# Altium PCB mini_backplane.PcbDoc (part 3 of 3)
Units mil, origin at the board's own origin, x right, y up, seen from the top; angles counter-clockwise.
Board outline 11387.22 x 6068.2 mil, 4 copper layers (Top Layer, POWER, GND, Bottom Layer); 147 components, 166 nets, 1018 pads, 501 vias.
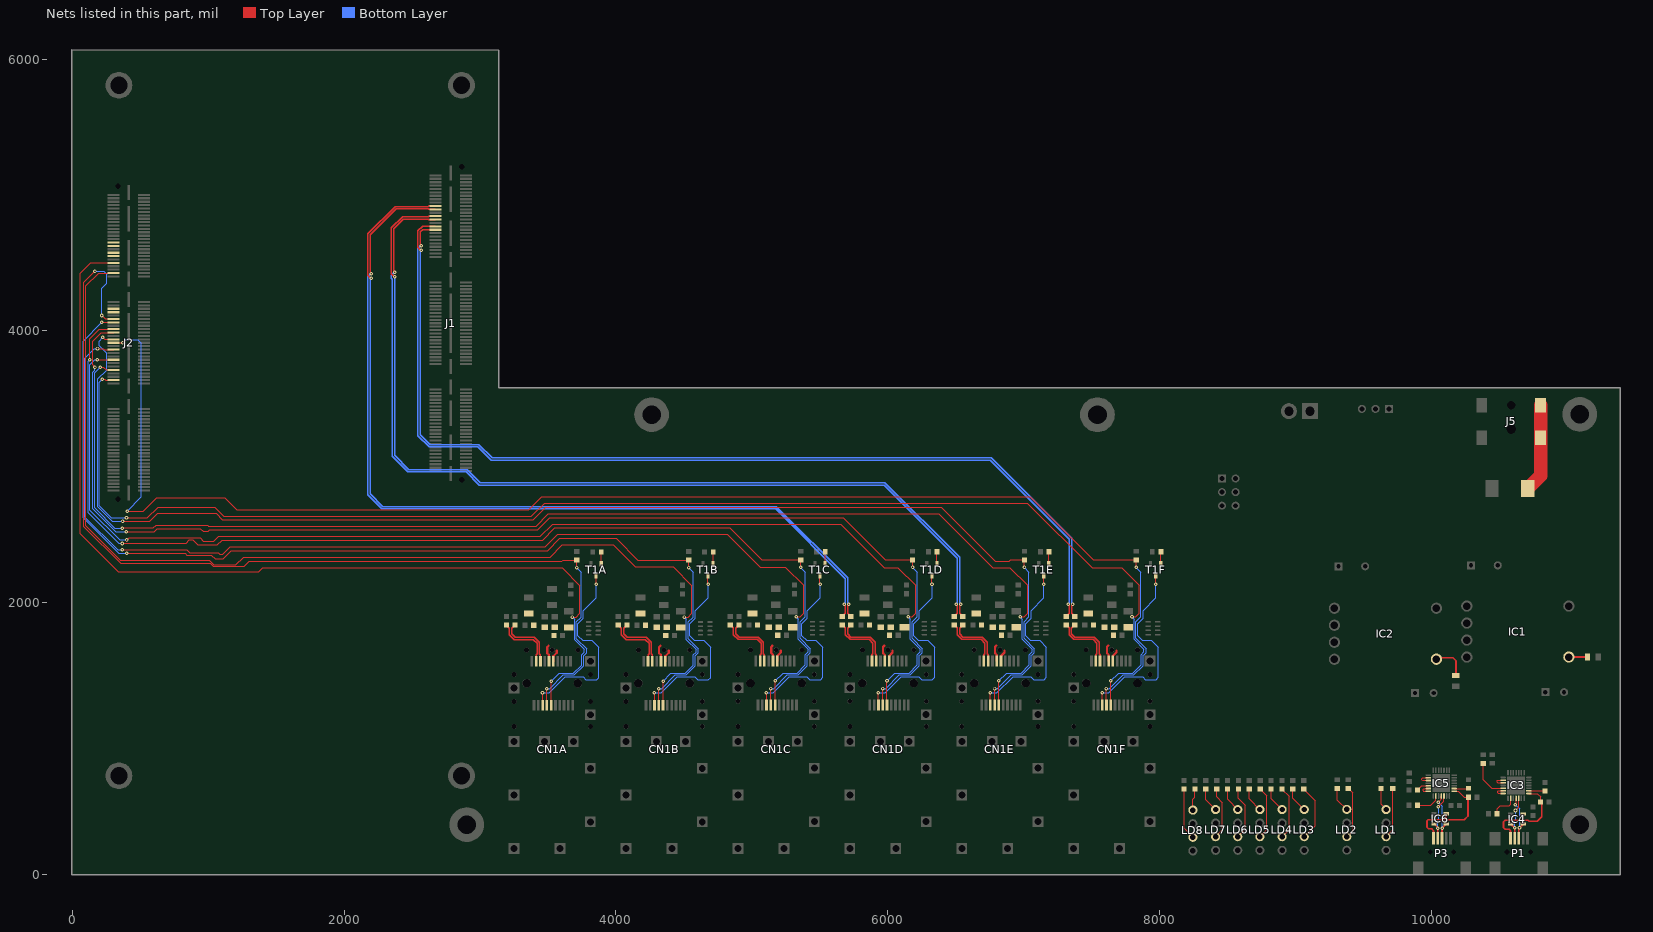
[diagram p5: the nets of this part, all layers, seen from the top]

## Via types
v1: diameter 26, hole 12, Top Layer to Bottom Layer, tented both sides, 501 vias

## Nets (pads, with @x,y where several pads share a name; then routed paths per layer and width w, separated by ;. In a path a pad name is that pad's centre, name@x,y a point inside that pad or via, vN(x,y) a via of type N, cw(c..) or ccw(c..) an arc to the next point about the centre after c; other vN are vias at no path point) (continued)
MGTTX112_3_N: C8D.1 J1.16 | length 6551.1
  Top Layer w11: v1(2201,4421) 2193,4429 2193,4707 2384.51,4898.51 2618.68,4898.51 2622.78,4894.41 J1.16@2672.64,4894.41 ; C8D.1@5665.18,1901.08 5688.18,1924.08 v1@5688.18,1983.5 ; v1(5680.68,1991) v1@5688.18,1983.5 ; v1@5688.18,1985 v1@5688.18,1983.5
  Bottom Layer w11: v1(2201,4421) 2197.35,4421 2175,4398.65 2175,2794.96 2278.96,2691 5174,2691 5688.18,2176.82 5688.18,1998.5 v1(5680.68,1991)
MGTTX112_3_P: C7D.1 J1.14 | length 6583.2
  Top Layer w11: v1(2200,4389) 2198.35,4389 2176,4411.35 2176,4714.04 2377.47,4915.51 2618.68,4915.51 2622.78,4919.61 J1.14@2672.64,4919.61 ; v1@5707.41,1996.27 v1(5712.68,1991) 5705.18,1983.5 5705.18,1924.08 C7D.1@5728.18,1901.08
  Bottom Layer w11: v1(2200,4389) 2192,4381 2192,2802 2286,2708 5181.04,2708 5705.18,2183.86 5705.18,1998.5 v1(5712.68,1991)
MGTTX113_0_N: C8E.1 J1.20 | length 6942.8
  Top Layer w11: v1(2373,4431) 2365,4439 2365,4439.5 2365,4751 2437.55,4823.55 2618.68,4823.55 2622.78,4819.45 J1.20@2672.64,4819.45 ; C8E.1@6488.18,1901.08 6511.18,1924.08 6511.18,1949.06 6511.18,1955 6511.18,1985 6511.18,1983.5 v1(6503.68,1991)
  Bottom Layer w11: v1(2373,4431) 2370.35,4431 2347.5,4408.15 2347.5,4387.85 2355,4380.35 2355,3078.96 2469.96,2964 2898.96,2964 2995.96,2867 5972,2867 6511.18,2327.82 6511.18,1998.5 v1(6503.68,1991)
MGTTX113_0_P: C7E.1 J1.18 | length 6967.2
  Top Layer w11: v1(2372,4398) 2371.35,4398 2348,4421.35 2348,4439.5 2348,4758.04 2430.51,4840.55 2618.68,4840.55 2622.78,4844.65 J1.18@2672.64,4844.65 ; v1@6530.41,1996.27 v1(6535.68,1991) 6528.18,1983.5 6528.18,1924.08 C7E.1@6551.18,1901.08
  Bottom Layer w11: v1(2372,4398) 2372,3086 2477,2981 2906,2981 3003,2884 5979.04,2884 6528.18,2334.86 6528.18,1998.5 v1(6535.68,1991)
MGTTX113_1_N: C8F.1 J1.24 | length 7322
  Top Layer w11: v1(2568,4626) 2562,4632 2562,4729 2579,4746 2671.13,4746 J1.24@2672.64,4744.49 ; C8F.1@7311.18,1901.08 7334.18,1924.08 v1@7334.18,1983.5 ; v1(7326.68,1991) v1@7334.18,1983.5 ; v1@7334.18,1985 v1@7334.18,1983.5
  Bottom Layer w11: v1(2568,4626) 2565.35,4626 2543,4603.65 2543,3230.96 2625.96,3148 2984.96,3148 3082.96,3050 6752,3050 7334.18,2467.82 7334.18,1998.5 v1(7326.68,1991)
MGTTX113_1_P: C7F.1 J1.22 | length 7351.9
  Top Layer w11: v1(2568,4594) 2565.35,4594 2543.5,4615.85 2543.5,4735.5 2577.68,4769.68 J1.22@2672.64,4769.68 ; v1(7358.68,1991) 7351.18,1983.5 7351.18,1924.08 C7F.1@7374.18,1901.08
  Bottom Layer w11: v1@2560,4586 2560,3238 2633,3165 2992,3165 3090,3067 6759.04,3067 7351.18,2474.86 7351.18,1998.5 v1(7358.68,1991) ; v1@2560,4587 v1@2567.5,4594.5
NetC1A_1: C1A.1 C2A.1 CN1A.15 L2A.1 | length 89.7
  Top Layer w16: CN1A.15@3539.58,1570.85 3539.58,1608.37 3565,1633.78 3565,1650
NetC1B_1: C1B.1 C2B.1 CN1B.15 L2B.1 | length 89.7
  Top Layer w16: CN1B.15@4362.58,1570.85 4362.58,1608.37 4388,1633.78 4388,1650
NetC1C_1: C1C.1 C2C.1 CN1C.15 L2C.1 | length 89.7
  Top Layer w16: CN1C.15@5186.58,1571.85 5186.58,1609.37 5212,1634.78 5212,1651
NetC1D_1: C1D.1 C2D.1 CN1D.15 L2D.1 | length 89.7
  Top Layer w16: CN1D.15@6009.58,1571.85 6009.58,1609.37 6035,1634.78 6035,1651
NetC1E_1: C1E.1 C2E.1 CN1E.15 L2E.1 | length 89.7
  Top Layer w16: CN1E.15@6832.58,1571.85 6832.58,1609.37 6858,1634.78 6858,1651
NetC1F_1: C1F.1 C2F.1 CN1F.15 L2F.1 | length 89.7
  Top Layer w16: CN1F.15@7655.58,1571.85 7655.58,1609.37 7681,1634.78 7681,1651
NetC3A_2: C3A.2 C4A.2 CN1A.16 L1A.1 | length 123.7
  Top Layer w16: 3505,1685 3495,1675 3495,1630 3508.09,1616.91 CN1A.16@3508.09,1570.85
NetC3B_2: C3B.2 C4B.2 CN1B.16 L1B.1 | length 123.7
  Top Layer w16: 4328,1685 4318,1675 4318,1630 4331.09,1616.91 CN1B.16@4331.09,1570.85
NetC3C_2: C3C.2 C4C.2 CN1C.16 L1C.1 | length 123.7
  Top Layer w16: 5152,1686 5142,1676 5142,1631 5155.09,1617.91 CN1C.16@5155.09,1571.85
NetC3D_2: C3D.2 C4D.2 CN1D.16 L1D.1 | length 123.7
  Top Layer w16: 5975,1686 5965,1676 5965,1631 5978.09,1617.91 CN1D.16@5978.09,1571.85
NetC3E_2: C3E.2 C4E.2 CN1E.16 L1E.1 | length 123.7
  Top Layer w16: 6798,1686 6788,1676 6788,1631 6801.09,1617.91 CN1E.16@6801.09,1571.85
NetC3F_2: C3F.2 C4F.2 CN1F.16 L1F.1 | length 123.7
  Top Layer w16: 7621,1686 7611,1676 7611,1631 7624.09,1617.91 CN1F.16@7624.09,1571.85
NetC14_1: C14.1 IC3.8 IC4.4 P1.1 | length 756.2
  Top Layer w6: IC3.8@10715.49,597.94 10776.06,597.94 10801.5,572.5 C14.1@10801.5,536
  Top Layer w12: P1.1@10579.99,269 10579.99,325.01 10570,335 10541,335 10529,347 10529,390 10541,402 10675,402 ; IC4.4@10673.28,447.4 10675,445.68 10675,402 ; C14.1@10801.5,536 10811,526.5 10811,426.64 10777.36,393 10717,393 10708,402 10675,402
NetC16_1: C16.1 IC5.8 IC6.4 P3.1 | length 802.9
  Top Layer w6: IC5.8@10165.49,614.94 10195.06,614.94 10239,571 C16.1@10271.5,571
  Top Layer w12: P3.1@10013.99,269 10013.99,325.01 10000,339 9977,339 9966,350 9966,396 9974,404 10048,404 ; 10062.87,404 10048,404 ; IC6.4@10108.28,449.4 10108.28,405.72 10110,404 ; C16.1@10271.5,571 10268,567.5 10268,432 10240,404 10048,404
NetD1_2: D1.2 J5.3 | length 653.4
  Top Layer w100: D1.2@10706.89,2841 10801.54,2935.65 J5.3@10801.54,3215.01 J5.3@10801.54,3455.17
NetIC1_5: IC1.5 R18.2 | length 137.4
  Top Layer w12: IC1.5@11009.2,1601.99 R18.2@11146.62,1601.99
NetIC2_5: IC2.5 R19.2 | length 261.5
  Top Layer w12: IC2.5@10036.2,1596.99 10157.01,1596.99 10179,1575 R19.2@10179,1465.37
NetIC3_2: IC3.2 R21.2 | length 194.2
  Top Layer w6: R21.2@10481.5,449 10481.5,485.5 10503,507 10570,507 10581.63,518.63 IC3.2@10581.63,562.51
NetIC3_4: IC3.4 IC4.3 P1.3 | length 348
  Top Layer w6: v1(10616,515) 10621,520 IC3.4@10621,562.51
  Top Layer w12: P1.3@10642,269 10642,341.32 v1(10646.34,345.66) IC4.3@10673.28,372.6
  Bottom Layer w6: v1(10616,515) 10646.34,484.66 v1(10646.34,345.66)
NetIC3_5: IC3.5 IC4.2 P1.2 | length 345.3
  Top Layer w6: v1(10617,473) 10640.68,496.68 IC3.5@10640.68,562.51
  Top Layer w12: IC4.2@10582.72,372.6 v1(10610.5,344.82) P1.2@10610.5,269
  Bottom Layer w6: v1(10610.5,344.82) 10610.5,399.5 10617,406 v1(10617,473)
NetIC3_9: IC3.9 R20.1 | length 119
  Top Layer w6: IC3.9@10715.49,617.63 10832.87,617.63 R20.1@10834,616.5
NetIC3_23: IC3.23 IC3.24 | length 106.2
  Top Layer w6: IC3.24@10526.51,676.68 10485.32,676.68 10481,681 10481,693 10484.37,696.37 10489,696.37 10492,696.37 IC3.23@10526.51,696.37
NetIC3_26: IC3.26 R22.2 | length 293.2
  Top Layer w6: R22.2@10380,819.5 10380,698 10440.68,637.32 IC3.26@10526.51,637.32
NetIC3_27: IC3.27 IC3.28 | length 95.6
  Top Layer w6: IC3.28@10526.51,597.94 10525.46,599 10490,599 10486,603 10486,614 10489.63,617.63 IC3.27@10526.51,617.63
NetIC5_2: IC5.2 R25.2 | length 181.6
  Top Layer w6: R25.2@9896.5,511 9994,511 10031.63,548.63 IC5.2@10031.63,579.51
NetIC5_4: IC5.4 IC6.3 P3.3 | length 377.5
  Top Layer w6: v1(10050,533) 10050,535 10071,556 IC5.4@10071,579.51
  Top Layer w12: P3.3@10076,269 v1@10076,342.32 ; v1(10077,342) 10076.32,342 v1@10076,342.32 ; IC6.3@10108.28,374.6 v1@10076,342.32
  Bottom Layer w6: v1(10050,533) 10077,506 v1(10077,342)
NetIC5_5: IC5.5 IC6.2 P3.2 | length 373.3
  Top Layer w6: v1@10050,501.89 10090.68,542.57 IC5.5@10090.68,579.51
  Top Layer w12: IC6.2@10017.72,374.6 10044.5,347.82 v1(10044.5,342) P3.2@10044.5,269
  Bottom Layer w6: v1(10044.5,342) 10044.5,400.5 10051,407 10051,500 v1(10050,501)
NetIC5_9: IC5.9 R24.1 | length 106.3
  Top Layer w6: IC5.9@10165.49,634.63 10269.13,634.63 R24.1@10271,636.5
NetIC5_23: IC5.23 IC5.24 | length 107.9
  Top Layer w6: IC5.24@9976.51,693.68 9976.2,694 9935,694 9929,700 9929,708 9934.37,713.37 IC5.23@9976.51,713.37
NetIC5_26: IC5.26 R26.2 | length 92.6
  Top Layer w6: R26.2@9896.5,624 9926.81,654.32 IC5.26@9976.51,654.32
NetIC5_27: IC5.27 IC5.28 | length 95.4
  Top Layer w6: IC5.28@9976.51,614.94 9939.06,614.94 9937,617 9937,631 9940.63,634.63 IC5.27@9976.51,634.63
NetLD1_2: LD1.2 R1.2 | length 372.8
  Top Layer w6: LD1.2@9665,283 9714,332 R1.2@9714,635.5
NetLD1_4: LD1.4 R2.2 | length 167.8
  Top Layer w6: R2.2@9628,635.5 9628,520 LD1.4@9665,483
NetLD2_2: LD2.2 R3.2 | length 385.5
  Top Layer w6: LD2.2@9376,281 9418.46,323.46 9418.46,603.04 R3.2@9386,635.5
NetLD2_4: LD2.4 R4.2 | length 183.1
  Top Layer w6: R4.2@9307,635.5 9307,550 LD2.4@9376,481
NetLD3_2: LD3.2 R5.2 | length 419.3
  Top Layer w6: R5.2@9059,630.5 9144,545.5 9144,361 LD3.2@9063,280
NetLD3_4: LD3.4 R6.2 | length 185.3
  Top Layer w6: R6.2@8979,630.5 8979,564 LD3.4@9063,480
NetLD4_2: LD4.2 R7.2 | length 394
  Top Layer w6: R7.2@8899,630.5 8952,577.5 8952,332.01 LD4.2@8899.99,280
NetLD4_4: LD4.4 R8.2 | length 184
  Top Layer w6: R8.2@8819,630.5 8819,560.99 LD4.4@8899.99,480
NetLD5_2: LD5.2 R9.2 | length 391.9
  Top Layer w6: LD5.2@8736.97,280 8788,331.03 8788,581.5 R9.2@8739,630.5
NetLD5_4: LD5.4 R10.2 | length 182.8
  Top Layer w6: R10.2@8659,630.5 8659,557.97 LD5.4@8736.97,480
NetLD6_2: LD6.2 R11.2 | length 393.2
  Top Layer w6: LD6.2@8573.96,280 8628,334.04 8628,513 8579,562 R11.2@8579,630.5
NetLD6_4: LD6.4 R12.2 | length 181.6
  Top Layer w6: R12.2@8499,630.5 8499,554.96 LD6.4@8573.96,480
NetLD7_2: LD7.2 R13.2 | length 388.6
  Top Layer w6: LD7.2@8410.95,280 8461,330.05 8461,531 8419,573 R13.2@8419,630.5
NetLD7_4: LD7.4 R14.2 | length 180.3
  Top Layer w6: R14.2@8339,630.5 8339,551.95 LD7.4@8410.95,480
NetLD8_2: LD8.2 R15.2 | length 381.4
  Top Layer w6: R15.2@8179,630.5 8179,341.06 LD8.2@8244,276.06
NetLD8_4: LD8.4 R16.2 | length 160.7
  Top Layer w6: LD8.4@8244,476.06 8244,554 8259,569 R16.2@8259,630.5
NetR28A_2: R28A.2 T1A.1 | length 86.2
  Top Layer w6: T1A.1@3891.4,2288.28 3891.4,2372.91 R28A.2@3892.5,2374
NetR28B_2: R28B.2 T1B.1 | length 86.2
  Top Layer w6: T1B.1@4714.4,2288.28 4714.4,2372.91 R28B.2@4715.5,2374
NetR28C_2: R28C.2 T1C.1 | length 86.2
  Top Layer w6: T1C.1@5538.4,2289.28 5538.4,2373.91 R28C.2@5539.5,2375
NetR28D_2: R28D.2 T1D.1 | length 86.2
  Top Layer w6: T1D.1@6361.4,2289.28 6361.4,2373.91 R28D.2@6362.5,2375
NetR28E_2: R28E.2 T1E.1 | length 86.2
  Top Layer w6: T1E.1@7184.4,2289.28 7184.4,2373.91 R28E.2@7185.5,2375
NetR28F_2: R28F.2 T1F.1 | length 86.2
  Top Layer w6: T1F.1@8007.4,2289.28 8007.4,2373.91 R28F.2@8008.5,2375
PB0: CN1B.4 J2.57 R17B.1 | length 7645.9
  Top Layer w6: v1(219,4063) 219.15,4063.15 J2.57@304.53,4063.15 ; v1(401,2365) 832,2365 845,2352 1025,2352 1053,2324 1110,2324 1171,2385 1243,2385 ; 1213,2385 1243,2385 ; v1(4315,1369) 4315.34,1368.66 CN1B.4@4315.34,1248.02 ; 4434.5,2315.5 4453,2315.5 ; v1(4535,2260) R17B.1@4535,2315.5 4453,2315.5 ; 1243,2385 3496.97,2385 3585.97,2474 4001.88,2474 4160.38,2315.5 4453,2315.5
  Bottom Layer w6: v1(219,4063) 81,3925 81,2626.03 342.03,2365 v1(401,2365) ; v1(4315,1369) 4336,1369 4437,1470 4517,1470 4585,1538 4585,1612.29 4591.93,1619.22 4592.22,1619.22 4607,1634 4607,1663 4532,1738 4532,1860 4568,1896 4568,2226 v1@4532,2262
PB1: CN1D.4 J2.53 R17D.1 | length 9025.9
  Top Layer w6: v1(168,3734) 151,3751 151,3924 215.19,3988.19 J2.53@304.53,3988.19 ; v1(398,2524) 604,2524 626,2546 943,2546 963,2526 1003,2526 1014,2537 1229,2537 ; 1225,2537 1229,2537 ; v1(5962,1370) 5962.34,1369.66 CN1D.4@5962.34,1249.02 ; v1(6182,2261) R17D.1@6182,2316.5 5982.38,2316.5 5671.88,2627 3515.12,2627 3425.12,2537 1229,2537
  Bottom Layer w6: v1(168,3734) 168,3713 153,3698 153,2693.15 322.15,2524 v1(398,2524) ; v1(5962,1370) 5983,1370 6084,1471 6164,1471 6232,1539 6232,1613.29 6238.93,1620.22 6239.22,1620.22 6254,1635 6254,1664 6179,1739 6179,1861 6215,1897 6215,2227 v1@6179,2263
PB2: CN1C.4 J2.55 R17C.1 | length 8325.7
  Top Layer w6: v1(129,3789) 129,3942 200.39,4013.39 J2.55@304.53,4013.39 ; v1(369,2437) 370,2438 838,2438 863,2463 887,2463 924,2426 1068,2426 1103,2461 1232,2461 ; 1217,2461 1232,2461 ; v1(5139,1370) 5139.34,1369.66 CN1C.4@5139.34,1249.02 ; v1(5359,2261) R17C.1@5359,2316.5 5074.53,2316.5 4839.03,2552 3551.12,2552 3460.12,2461 1232,2461
  Bottom Layer w6: v1(129,3789) 117,3777 117,2664 344,2437 v1(369,2437) ; v1(5139,1370) 5160,1370 5261,1471 5341,1471 5409,1539 5409,1613.29 5415.93,1620.22 5416.22,1620.22 5431,1635 5431,1664 5356,1739 5356,1861 5392,1897 5392,2227 v1@5356,2263
PB3: CN1E.4 J2.51 R17E.1 | length 9825.1
  Top Layer w6: v1(226,3954) 241.58,3938.43 J2.51@304.53,3938.43 ; v1(371,2601) 571,2601 629.12,2659.12 1006,2659.12 ; 993.12,2659.12 1006,2659.12 ; v1(6785,1370) 6785.34,1369.66 CN1E.4@6785.34,1249.02 ; v1(7005,2261) R17E.1@7005,2316.5 6904.5,2316.5 6895,2307 6791.03,2307 6394.03,2704 3484.12,2704 3393.12,2613 1106.06,2613 1059.94,2659.12 1006,2659.12
  Bottom Layer w6: v1(226,3954) 198,3926 198,3891 253,3836 253,3713 189,3649 189,2708.06 296.06,2601 v1(371,2601) ; v1(6785,1370) 6806,1370 6907,1471 6987,1471 7055,1539 7055,1613.29 7061.93,1620.22 7062.22,1620.22 7077,1635 7077,1664 7002,1739 7002,1861 7038,1897 7038,2227 v1@7002,2263
PB4: CN1A.4 J2.59 R17A.1 | length 7539.6
  Top Layer w6: 85,2716 85,2694 ; v1(168,4440) 85,4357 85,2694 ; v1(219,4114) 244.65,4088.35 J2.59@304.53,4088.35 ; 366,2290 378,2290 ; 1405,2306 1408,2306 ; v1(3492,1369) 3492.34,1368.66 CN1A.4@3492.34,1248.02 ; v1(3712,2260) R17A.1@3712,2315.5 3611.5,2315.5 3602,2306 1408,2306 ; 85,2694 85,2561 356,2290 378,2290 ; 378,2290 1016,2290 1037,2269 1265.11,2269 1302.11,2306 1408,2306
  Bottom Layer w6: v1(168,4440) 233,4440 255,4418 255,4350 219,4314 v1(219,4114) ; v1(3492,1369) 3513,1369 3614,1470 3694,1470 3762,1538 3762,1612.29 3768.93,1619.22 3769.22,1619.22 3784,1634 3784,1663 3709,1738 3709,1860 3745,1896 3745,2226 v1@3709,2262
PB5: J2.61
PB6: CN1F.4 J2.49 R17F.1 | length 10549.7
  Top Layer w6: J2.49@303.76,3914 J2.49@304.53,3913.23 371.77,3913.23 v1(372,3913) ; v1(405,2674) 525,2674 623,2772 1123.89,2772 1210.89,2685 3358.12,2685 3455.12,2782 7046.88,2782 7512.38,2316.5 R17F.1@7828,2316.5 v1(7828,2261) ; v1(7608,1370) 7608.34,1369.66 CN1F.4@7608.34,1249.02
  Bottom Layer w6: v1@372,3914 395,3937 482,3937 510,3909 510,2779 v1(405,2674) ; v1(7608,1370) 7629,1370 7730,1471 7810,1471 7878,1539 7878,1613.29 7884.93,1620.22 7885.22,1620.22 7900,1635 7900,1664 7825,1739 7825,1861 7861,1897 7861,2227 v1@7825,2263
PB7: J2.63
PE1: J2.75
PE2: J2.73
PE4: CN1D.5 J2.43 | length 8828.9
  Top Layer w6: v1(186,3789) 186.5,3788.5 J2.43@304.53,3788.5 ; v1@402,2454 398,2458 419,2479 941.11,2479 966.11,2454 1042,2454 1061,2473 ; 1058,2470 1061,2473 ; 1225,2489 1229,2489 ; CN1D.5@5993.83,1249.02 5993.83,1425.83 v1(5994,1426) ; v1(6150,1897) 6179,1897 6205,1923 6205,2128 6074,2259 5972,2259 5652,2579 3535,2579 3445,2489 1229,2489 ; 1061,2473 1077,2489 1229,2489
  Bottom Layer w6: v1(186,3789) 166.03,3789 129,3751.97 129,2683.21 349.21,2463 v1(402,2463) ; v1(5994,1426) 6052,1484 6157,1484 6217,1544 6217,1618 6238,1639 6238,1659 6166,1731 6166,1881 ; v1(6150,1897) 6166,1881 ; 6160,1887 6166,1881
PE5: CN1B.5 J2.67 | length 7922.6
  Top Layer w6: J2.67@304.53,4425.98 194.98,4425.98 101,4332 101,2568.89 354.89,2315 411,2315 ; 401,2315 411,2315 ; 1399,2337 1419,2337 ; CN1B.5@4346.83,1248.02 4346.83,1424.83 v1(4347,1425) ; v1(4503,1896) 4532,1896 4558,1922 4558,2127.84 4420.84,2265 4275,2265 4143,2265 3982,2426 3605.85,2426 3516.85,2337 1419,2337 ; 411,2315 1009,2315 1043,2281 1205.06,2281 1261.06,2337 1419,2337
  Bottom Layer w6: v1(4347,1425) 4405,1483 4510,1483 4570,1543 4570,1617 4591,1638 4591,1658 4519,1730 4519,1880 ; v1(4503,1896) 4519,1880 ; 4513,1886 4519,1880
PE6: CN1A.5 J2.71 | length 7197.7
  Top Layer w6: J2.71@304.53,4500.94 138.94,4500.94 61,4423 61,2507 338,2230 378,2230 ; 363,2230 378,2230 ; 1405,2258 1415,2258 ; CN1A.5@3523.83,1248.02 3523.83,1424.83 v1(3524,1425) ; v1(3680,1896) 3709,1896 3735,1922 3735,2127 3604,2258 1415,2258 ; 378,2230 1374,2230 1402,2258 1415,2258
  Bottom Layer w6: v1(3524,1425) 3582,1483 3687,1483 3747,1543 3747,1617 3768,1638 3768,1658 3696,1730 3696,1880 ; v1(3680,1896) 3696,1880 ; 3690,1886 3696,1880
PE7: J2.77
PE9: J2.79
PE11: CN1C.5 J2.47 | length 8170.3
  Top Layer w6: v1(186.89,3871) 228,3871 235.54,3863.46 J2.47@304.53,3863.46 ; v1(368,2390) 843,2390 865,2368 1075.11,2368 1085.11,2358 1107.11,2358 1162.11,2413 1229,2413 ; 1217,2413 1229,2413 ; CN1C.5@5170.83,1249.02 5170.83,1425.83 v1(5171,1426) ; v1(5327,1897) 5356,1897 5382,1923 5382,2128 5247,2263 5180,2263 5060.15,2263 4819.15,2504 3571,2504 3480,2413 1229,2413
  Bottom Layer w6: v1(186.89,3871) 162.92,3871 93,3801.08 93,2631 334,2390 v1(368,2390) ; v1(5171,1426) 5229,1484 5334,1484 5394,1544 5394,1618 5415,1639 5415,1659 5343,1731 5343,1881 ; v1(5327,1897) 5343,1881 ; 5337,1887 5343,1881
PE12: CN1F.5 J2.35 | length 10191.5
  Top Layer w6: v1(223,3646) 241,3646 248.42,3638.58 J2.35@304.53,3638.58 ; v1(400,2625) 554,2625 633.37,2704.37 1048.63,2704.37 1116,2637 3378,2637 3475,2734 7027,2734 7502,2259 7720,2259 7851,2128 7851,1923 7825,1897 v1(7796,1897) ; CN1F.5@7639.83,1249.02 7639.83,1425.83 v1(7640,1426)
  Bottom Layer w6: v1(223,3646) 201,3624 201,3595 201,2713.03 289.03,2625 v1(400,2625) ; v1(7640,1426) 7698,1484 7803,1484 7863,1544 7863,1618 7884,1639 7884,1659 7812,1731 7812,1881 ; v1(7796,1897) 7812,1881 ; 7806,1887 7812,1881
PE13: CN1E.5 J2.39 | length 9485
  Top Layer w6: v1(207,3733) 230,3733 249.46,3713.54 J2.39@304.53,3713.54 ; v1(368,2550) 369,2551 597,2551 618,2572 996.11,2572 1003.11,2565 1236,2565 ; 1228,2565 1236,2565 ; CN1E.5@6816.83,1249.02 6816.83,1425.83 v1(6817,1426) ; v1(6973,1897) 7002,1897 7028,1923 7028,2128 6897,2259 6771.15,2259 6374.15,2656 3504,2656 3413,2565 1236,2565
  Bottom Layer w6: v1(207,3733) 165,3691 165,2698.12 313.12,2550 v1(368,2550) ; v1(6817,1426) 6875,1484 6980,1484 7040,1544 7040,1618 7061,1639 7061,1659 6989,1731 6989,1881 ; v1(6973,1897) 6989,1881 ; 6983,1887 6989,1881
TD_INA_N: C8A.2 CN1A.19 | length 453.6
  Top Layer w11: C8A.2@3195.18,1837.09 3217.25,1815.02 3217.25,1795.27 ; 3217.25,1803.15 3217.25,1795.27 ; CN1A.19@3413.6,1570.85 3413.6,1617.43 3420.85,1624.68 3420.85,1703.17 3393.7,1730.32 3251.97,1730.32 3217.25,1765.03 3217.25,1795.27
TD_INA_P: C7A.2 CN1A.18 | length 464.2
  Top Layer w11: 3234.25,1803.15 3234.25,1785.43 ; C7A.2@3258.18,1837.09 3234.25,1813.16 3234.25,1785.43 ; CN1A.18@3445.09,1570.85 3445.09,1617.43 3437.85,1624.68 3437.85,1710.21 3400.74,1747.32 3259.01,1747.32 3234.25,1772.07 3234.25,1785.43
TD_INB_N: C8B.2 CN1B.19 | length 453.6
  Top Layer w11: C8B.2@4018.18,1837.09 4040.25,1815.02 4040.25,1795.27 ; 4040.25,1803.15 4040.25,1795.27 ; CN1B.19@4236.6,1570.85 4236.6,1617.43 4243.85,1624.68 4243.85,1703.17 4216.7,1730.32 4074.97,1730.32 4040.25,1765.03 4040.25,1795.27
TD_INB_P: C7B.2 CN1B.18 | length 464.2
  Top Layer w11: 4057.25,1803.15 4057.25,1785.43 ; C7B.2@4081.18,1837.09 4057.25,1813.16 4057.25,1785.43 ; CN1B.18@4268.09,1570.85 4268.09,1617.43 4260.85,1624.68 4260.85,1710.21 4223.74,1747.32 4082.01,1747.32 4057.25,1772.07 4057.25,1785.43
TD_INC_N: C8C.2 CN1C.19 | length 453.6
  Top Layer w11: C8C.2@4842.18,1838.09 4864.25,1816.02 4864.25,1796.27 ; 4864.25,1804.15 4864.25,1796.27 ; CN1C.19@5060.6,1571.85 5060.6,1618.43 5067.85,1625.68 5067.85,1704.17 5040.7,1731.32 4898.97,1731.32 4864.25,1766.03 4864.25,1796.27
TD_INC_P: C7C.2 CN1C.18 | length 464.2
  Top Layer w11: 4881.25,1804.15 4881.25,1786.43 ; C7C.2@4905.18,1838.09 4881.25,1814.16 4881.25,1786.43 ; CN1C.18@5092.09,1571.85 5092.09,1618.43 5084.85,1625.68 5084.85,1711.21 5047.74,1748.32 4906.01,1748.32 4881.25,1773.07 4881.25,1786.43
TD_IND_N: C8D.2 CN1D.19 | length 453.6
  Top Layer w11: C8D.2@5665.18,1838.09 5687.25,1816.02 5687.25,1796.27 ; 5687.25,1804.15 5687.25,1796.27 ; CN1D.19@5883.6,1571.85 5883.6,1618.43 5890.85,1625.68 5890.85,1704.17 5863.7,1731.32 5721.97,1731.32 5687.25,1766.03 5687.25,1796.27
TD_IND_P: C7D.2 CN1D.18 | length 464.2
  Top Layer w11: 5704.25,1804.15 5704.25,1786.43 ; C7D.2@5728.18,1838.09 5704.25,1814.16 5704.25,1786.43 ; CN1D.18@5915.09,1571.85 5915.09,1618.43 5907.85,1625.68 5907.85,1711.21 5870.74,1748.32 5729.01,1748.32 5704.25,1773.07 5704.25,1786.43
TD_INE_N: C8E.2 CN1E.19 | length 453.6
  Top Layer w11: C8E.2@6488.18,1838.09 6510.25,1816.02 6510.25,1796.27 ; 6510.25,1804.15 6510.25,1796.27 ; CN1E.19@6706.6,1571.85 6706.6,1618.43 6713.85,1625.68 6713.85,1704.17 6686.7,1731.32 6544.97,1731.32 6510.25,1766.03 6510.25,1796.27
TD_INE_P: C7E.2 CN1E.18 | length 464.2
  Top Layer w11: 6527.25,1804.15 6527.25,1786.43 ; C7E.2@6551.18,1838.09 6527.25,1814.16 6527.25,1786.43 ; CN1E.18@6738.09,1571.85 6738.09,1618.43 6730.85,1625.68 6730.85,1711.21 6693.74,1748.32 6552.01,1748.32 6527.25,1773.07 6527.25,1786.43
TD_INF_N: C8F.2 CN1F.19 | length 453.6
  Top Layer w11: C8F.2@7311.18,1838.09 7333.25,1816.02 7333.25,1796.27 ; 7333.25,1804.15 7333.25,1796.27 ; CN1F.19@7529.6,1571.85 7529.6,1618.43 7536.85,1625.68 7536.85,1704.17 7509.7,1731.32 7367.97,1731.32 7333.25,1766.03 7333.25,1796.27
TD_INF_P: C7F.2 CN1F.18 | length 464.2
  Top Layer w11: 7350.25,1804.15 7350.25,1786.43 ; C7F.2@7374.18,1838.09 7350.25,1814.16 7350.25,1786.43 ; CN1F.18@7561.09,1571.85 7561.09,1618.43 7553.85,1625.68 7553.85,1711.21 7516.74,1748.32 7375.01,1748.32 7350.25,1773.07 7350.25,1786.43
TX_DISABLEA: CN1A.3 T1A.3 | length 1471.8
  Top Layer w6: CN1A.3@3460.84,1248.02 v1@3460.84,1337.16 ; v1@3854,2138 T1A.3@3854,2197.72
  Bottom Layer w6: v1(3460,1338) 3510,1338 3628,1456 3700,1456 3758,1456 3779,1435 3858,1435 3874,1451 3874,1674 3823,1725 3754.89,1725 3721,1758.89 3721,1847 3761,1887 3761,1943 3855,2037 v1(3855,2137)
TX_DISABLEB: CN1B.3 T1B.3 | length 1471.8
  Top Layer w6: CN1B.3@4283.84,1248.02 v1@4283.84,1337.16 ; v1@4677,2138 T1B.3@4677,2197.72
  Bottom Layer w6: v1(4283,1338) 4333,1338 4451,1456 4523,1456 4581,1456 4602,1435 4681,1435 4697,1451 4697,1674 4646,1725 4577.89,1725 4544,1758.89 4544,1847 4584,1887 4584,1943 4678,2037 v1(4678,2137)
TX_DISABLEC: CN1C.3 T1C.3 | length 1471.8
  Top Layer w6: CN1C.3@5107.84,1249.02 v1@5107.84,1338.16 ; v1@5501,2139 T1C.3@5501,2198.72
  Bottom Layer w6: v1(5107,1339) 5157,1339 5275,1457 5347,1457 5405,1457 5426,1436 5505,1436 5521,1452 5521,1675 5470,1726 5401.89,1726 5368,1759.89 5368,1848 5408,1888 5408,1944 5502,2038 v1(5502,2138)
TX_DISABLED: CN1D.3 T1D.3 | length 1471.8
  Top Layer w6: CN1D.3@5930.84,1249.02 v1@5930.84,1338.16 ; v1@6324,2139 T1D.3@6324,2198.72
  Bottom Layer w6: v1(5930,1339) 5980,1339 6098,1457 6170,1457 6228,1457 6249,1436 6328,1436 6344,1452 6344,1675 6293,1726 6224.89,1726 6191,1759.89 6191,1848 6231,1888 6231,1944 6325,2038 v1(6325,2138)
TX_DISABLEE: CN1E.3 T1E.3 | length 1471.8
  Top Layer w6: CN1E.3@6753.84,1249.02 v1@6753.84,1338.16 ; v1@7147,2139 T1E.3@7147,2198.72
  Bottom Layer w6: v1(6753,1339) 6803,1339 6921,1457 6993,1457 7051,1457 7072,1436 7151,1436 7167,1452 7167,1675 7116,1726 7047.89,1726 7014,1759.89 7014,1848 7054,1888 7054,1944 7148,2038 v1(7148,2138)
TX_DISABLEF: CN1F.3 T1F.3 | length 1471.8
  Top Layer w6: CN1F.3@7576.84,1249.02 v1@7576.84,1338.16 ; v1@7970,2139 T1F.3@7970,2198.72
  Bottom Layer w6: v1(7576,1339) 7626,1339 7744,1457 7816,1457 7874,1457 7895,1436 7974,1436 7990,1452 7990,1675 7939,1726 7870.89,1726 7837,1759.89 7837,1848 7877,1888 7877,1944 7971,2038 v1(7971,2138)
pads on no net: CN1A. CN1B. CN1C. CN1D. CN1E. CN1F. IC1.2 IC1.4 IC2.2 IC2.4 IC3.1 IC3.10 IC3.11 IC3.12 IC3.13 IC3.14 IC3.15 IC3.16 IC3.17 IC3.18 IC3.19 IC3.20 IC3.21 IC3.22 IC5.1 IC5.10 IC5.11 IC5.12 IC5.13 IC5.14 IC5.15 IC5.16 IC5.17 IC5.18 IC5.19 IC5.20 IC5.21 IC5.22 J1.25 J1.26 J1.27 J1.28 J1.29 J1.30 J1.31 J1.32 J1.33 J1.34 J1.35 J1.36 J1.37 J1.38 J1.39 J1.40 J1.41 J1.42 J1.43 J1.44 J1.45 J1.46 J1.47 J1.48 J1.49 J1.50 J1.51 J1.52 J1.53 J1.54 J1.55 J1.56 J1.57 J1.58 J1.59 J1.60 J1.61 J1.62 J1.63 J1.64 J1.65 J1.66 J1.67 J1.68 J1.69 J1.70 J1.71 J1.72 J1.73 J1.74 J1.75 J1.76 J1.77 J1.78 J1.79 J1.80 J1.82 J1.83 J1.84 J1.85 J1.86 J1.87 J1.88 J1.89 J1.90 J1.91 J1.92 J1.93 J1.94 J1.95 J1.96 J1.109 J1.110 J1.X J2.1 J2.3 J2.5 J2.7 J2.9 J2.11 J2.13 J2.15 J2.17 J2.19 J2.21 J2.23 J2.25 J2.27 J2.29 J2.31 J2.109 J2.110 J2.X J4.2 J5.2 J5.4 P1.4 P1.MTG1 P1.MTG2 P2.1 P2.4 P2.6 P3.4 P3.MTG1 P3.MTG2 RP1A.7 RP1B.7 RP1C.7 RP1D.7 RP1E.7 RP1F.7
copper on no net: | length 1181.1
  Top Layer w10: 11207.93,707.35 11207.93,825.46 11326.04,825.46 11326.04,707.35 11207.93,707.35
  Bottom Layer w10: 11207.93,1061.68 11326.04,1061.68 ; 11207.93,1061.68 11326.04,1061.68 ; 11207.93,1061.68 11207.93,1179.79 11326.04,1179.79 11326.04,1061.68 ; 11207.93,1061.68 11326.04,1061.68

## Polygon pours and split planes (outlines as drawn)
+3V3 on Top Layer "ThermalPad" (solid, pour order 1003): 3445,1870 3445,2040 3610,2040 3610,1870
NetC3A_2 on Top Layer "ThermalPad" (solid, pour order 1002): 3440,1830 3440,1955 3315,1955 3315,1835 3320,1830
NetC3A_2 on Top Layer "ThermalPad" (solid, pour order 1001): 3520,1570 3520,1860 3365,1860 3365,1795 3435,1795 3460,1770 3460,1570
NetC1A_1 on Top Layer "ThermalPad" (solid, pour order 1000): 3525,1525 3525,1860 3705,1860 3705,1755 3685,1735 3680,1730 3585,1730 3585,1645 3560,1620 3555,1615 3555,1525
+12V_PSU on Top Layer "ThermalPad" (solid, pour order 1000): 10340,2960 10540,2960 10540,2700 10340,2700
GND on Top Layer "ThermalPad" (solid, pour order 1001): 10470,3550 10210,3550 10210,3060 10470,3060
NetC1B_1 on Top Layer "ThermalPad" (solid, pour order 1000): 4347,1525 4347,1860 4527,1860 4527,1755 4507,1735 4502,1730 4407,1730 4407,1645 4382,1620 4377,1615 4377,1525
NetC3B_2 on Top Layer "ThermalPad" (solid, pour order 1001): 4342,1570 4342,1860 4187,1860 4187,1795 4257,1795 4282,1770 4282,1570
NetC3B_2 on Top Layer "ThermalPad" (solid, pour order 1002): 4262,1830 4262,1955 4137,1955 4137,1835 4142,1830
+3V3 on Top Layer "ThermalPad" (solid, pour order 1003): 4267,1870 4267,2040 4432,2040 4432,1870
NetC1C_1 on Top Layer "ThermalPad" (solid, pour order 1000): 5170,1527 5170,1862 5350,1862 5350,1757 5330,1737 5325,1732 5230,1732 5230,1647 5205,1622 5200,1617 5200,1527
NetC3C_2 on Top Layer "ThermalPad" (solid, pour order 1001): 5165,1572 5165,1862 5010,1862 5010,1797 5080,1797 5105,1772 5105,1572
NetC3C_2 on Top Layer "ThermalPad" (solid, pour order 1002): 5085,1832 5085,1957 4960,1957 4960,1837 4965,1832
+3V3 on Top Layer "ThermalPad" (solid, pour order 1003): 5090,1872 5090,2042 5255,2042 5255,1872
NetC1D_1 on Top Layer "ThermalPad" (solid, pour order 1000): 5994,1526 5994,1861 6174,1861 6174,1756 6154,1736 6149,1731 6054,1731 6054,1646 6029,1621 6024,1616 6024,1526
NetC3D_2 on Top Layer "ThermalPad" (solid, pour order 1001): 5989,1571 5989,1861 5834,1861 5834,1796 5904,1796 5929,1771 5929,1571
NetC3D_2 on Top Layer "ThermalPad" (solid, pour order 1002): 5909,1831 5909,1956 5784,1956 5784,1836 5789,1831
+3V3 on Top Layer "ThermalPad" (solid, pour order 1003): 5914,1871 5914,2041 6079,2041 6079,1871
NetC1E_1 on Top Layer "ThermalPad" (solid, pour order 1000): 6816,1526 6816,1861 6996,1861 6996,1756 6976,1736 6971,1731 6876,1731 6876,1646 6851,1621 6846,1616 6846,1526
NetC3E_2 on Top Layer "ThermalPad" (solid, pour order 1001): 6811,1571 6811,1861 6656,1861 6656,1796 6726,1796 6751,1771 6751,1571
NetC3E_2 on Top Layer "ThermalPad" (solid, pour order 1002): 6731,1831 6731,1956 6606,1956 6606,1836 6611,1831
+3V3 on Top Layer "ThermalPad" (solid, pour order 1003): 6736,1871 6736,2041 6901,2041 6901,1871
NetC1F_1 on Top Layer "ThermalPad" (solid, pour order 1000): 7640,1526 7640,1861 7820,1861 7820,1756 7800,1736 7795,1731 7700,1731 7700,1646 7675,1621 7670,1616 7670,1526
NetC3F_2 on Top Layer "ThermalPad" (solid, pour order 1001): 7635,1571 7635,1861 7480,1861 7480,1796 7550,1796 7575,1771 7575,1571
NetC3F_2 on Top Layer "ThermalPad" (solid, pour order 1002): 7555,1831 7555,1956 7430,1956 7430,1836 7435,1831
+3V3 on Top Layer "ThermalPad" (solid, pour order 1003): 7560,1871 7560,2041 7725,2041 7725,1871
GND on GND (split plane): 3119.9,6046.31 3119.9,3581 3120.29,3577.08 3121.43,3573.31 3123.29,3569.83 3125.79,3566.79 3128.83,3564.29 3132.31,3562.43 3136.08,3561.29 3140,3560.9 11365.9,3560.9 11365.9,19.16 18.88,19.16 18.88,6047.16
GND on GND (split plane): 11320.94,830.55 11213.03,830.55 11213.03,938.47 11320.94,938.47
+3V3 on POWER (split plane): 1745.95,4478.49 1745.95,3378 1746.15,3376.43 1746.76,3374.97 1747.72,3373.72 2322.72,2798.72 2323.97,2797.76 2325.43,2797.15 2327,2796.95 8437.49,2796.95 8641.95,2592.49 8641.95,1584 8642.15,1582.43 8642.76,1580.97 8643.72,1579.72 8973.72,1249.72 8974.97,1248.76 8976.43,1248.15 8978,1247.95 10122,1247.95 10123.57,1248.15 10125.03,1248.76 10126.28,1249.72 10163.28,1286.72 10164.24,1287.97 10164.85,1289.43 10165.05,1291 10165.05,1656.95 10538,1656.95 10539.57,1657.15 10541.03,1657.76 10542.28,1658.72 11095.51,2211.95 11365.9,2211.95 11365.9,19.16 18.88,19.16 18.88,4646.95 1577.49,4646.95
+5V on POWER (split plane): 3119.9,6046.31 3119.9,3581 3120.29,3577.08 3121.43,3573.31 3123.29,3569.83 3125.79,3566.79 3128.83,3564.29 3132.31,3562.43 3136.08,3561.29 3140,3560.9 8714.95,3560.9 8714.95,3207 8715.15,3205.43 8715.76,3203.97 8716.72,3202.72 9027.95,2891.49 9027.95,1754 9028.15,1752.43 9028.76,1750.97 9029.72,1749.72 9128.72,1650.72 9129.43,1650.18 9129.97,1649.76 9131.43,1649.15 9133,1648.95 9523,1648.95 9524.57,1649.15 9526.03,1649.76 9527.28,1650.72 9956.51,2079.95 10075.49,2079.95 10152.95,2002.49 10152.95,1667 10152.95,1663 10152.95,1293.51 10119.49,1260.05 8980.51,1260.05 8654.05,1586.51 8654.05,2595 8653.85,2596.57 8653.24,2598.03 8652.28,2599.28 8444.28,2807.28 8443.03,2808.24 8441.57,2808.85 8440,2809.05 2329.51,2809.05 1758.05,3380.51 1758.05,4481 1757.85,4482.57 1757.24,4484.03 1756.28,4485.28 1584.28,4657.28 1583.03,4658.24 1581.57,4658.85 1580,4659.05 18.88,4659.05 18.88,6047.16
+12V_PSU on POWER (split plane): 11365.9,2224.05 11093,2224.05 11091.43,2223.85 11089.97,2223.24 11088.72,2222.28 10535.49,1669.05 10165.05,1669.05 10165.05,2005 10164.85,2006.57 10164.24,2008.03 10163.28,2009.28 10082.28,2090.28 10081.03,2091.24 10079.57,2091.85 10078,2092.05 9954,2092.05 9952.43,2091.85 9951.4,2091.42 9950.97,2091.24 9950.43,2090.82 9949.72,2090.28 9520.49,1661.05 9135.51,1661.05 9040.05,1756.51 9040.05,2894 9039.85,2895.57 9039.42,2896.6 9039.24,2897.03 9038.82,2897.57 9038.28,2898.28 8727.05,3209.51 8727.05,3560.9 11365.9,3560.9
+3V3 on POWER (split plane): 11320.94,948.66 11213.03,948.66 11213.03,1056.58 11320.94,1056.58

## Other copper
Top Layer:
  text "1" at 11298.48,758.53 h60 r90
Bottom Layer:
  text "4" at 11298.48,1112.86 h60 r90
GND (plane layer: these items are gaps in the copper):
  rectangle: 2170,1045 3130,1724
  lines w10: 11207.93,825.46 11326.04,825.46 ; 11207.93,825.46 11207.93,943.57 11326.04,943.57 11326.04,825.46 ; 11207.93,825.46 11326.04,825.46
  text "2" at 11298.48,876.64 h60 r90
POWER (plane layer: these items are gaps in the copper):
  rectangle: 2170,1045 3130,1718
  lines w10: 11207.93,943.57 11326.04,943.57 ; 11207.93,943.57 11326.04,943.57 ; 11207.93,943.57 11207.93,1061.68 11326.04,1061.68 11326.04,943.57 ; 11207.93,943.57 11326.04,943.57
  lines w12: 0,4653 1580,4653 1752,4481 1752,3378 2327,2803 8440,2803 8648,2595 8648,1584 8978,1254 10122,1254 10159,1291 10159,1667 ; 8721,3597 8721,3207 9034,2894 9034,1754 9133,1655 9523,1655 9954,2086 10078,2086 10159,2005 10159,1663 10538,1663 11093,2218 11372,2218
  text "3" at 11298.48,994.75 h60 r90

## Silkscreen, mask and mechanical layers (free items; w line width, h text height)
Top Overlay:
  drawing of 492 lines, arcs and shapes, not listed
  text "WhiteRabbit" at 5112,3273 h170
  text "Switch MCH Mini-Backplane" at 4559,3144 h170
  text "T. W. 2011" at 5201,3017 h150
  text "rev 3.0pre" at 5206,2908 h150
  text "Connect to" at 8328,2531 h50
  text "MCH/P2" at 8367,2454 h50
  text "V3 SCB goes here" at 1005,1934 h170
  text "Licensed under CERN OHL v. 1.1" at 11329,1900 h60 r90
Mechanical 1:
  lines w7.87: 2230,1102 2230,1661 3050,1661 3050,1102 2230,1102
  lines w11.81: -1.22,-0.94 11386,-0.94 11386,3581 3140,3581 3140,6066.4 -1.22,6067.26 -1.22,-0.94

## Dimensions
3140,6066.4 to 3140,3581 on Drill Drawing
-1.22,6067.26 to -59.13,-1.32 on Drill Drawing
3140,6066.4 to -1.22,6067.26 on Drill Drawing
-1.22,-0.94 to 11386,-0.94 on Drill Drawing
2230,1102 to -1.22,-0.94 on Drill Drawing
2230,1661 to 2230,1102 on Drill Drawing
2230,1102 to -1.22,-0.94 on Drill Drawing
3050,1102 to 2230,1102 on Drill Drawing

## Text inside footprints (layer, text, board x,y; h text height)
C9: Top Overlay "+" at 9227.96,2241.44 h35; Mechanical 14 "+" at 9227.96,2241.44 h35
C10: Top Overlay "+" at 10752.96,1313.47 h35; Mechanical 14 "+" at 10752.96,1313.47 h35
C11: Top Overlay "+" at 10202.96,2248.44 h35; Mechanical 14 "+" at 10202.96,2248.44 h35
C12: Top Overlay "+" at 9793.96,1307.47 h35; Mechanical 14 "+" at 9793.96,1307.47 h35
P2: Top Overlay "6" at 8538,2655 h35 r270; Top Overlay "5" at 8438,2655 h35 r270; Top Overlay "2" at 8538,3015 h35 r270; Top Overlay "1" at 8438,2995 h35 r270